# Altium PCB RTL8812AU.PcbDoc
Units mm, origin at the board's own origin, x right, y up, seen from the top; angles counter-clockwise.
Board outline 49.77 x 25.25 mm, 4 copper layers (Top Layer, GND, Signal Layer 1, Bottom Layer), stack 0.996 mm thick; 106 components, 49 nets, 367 pads, 313 vias.
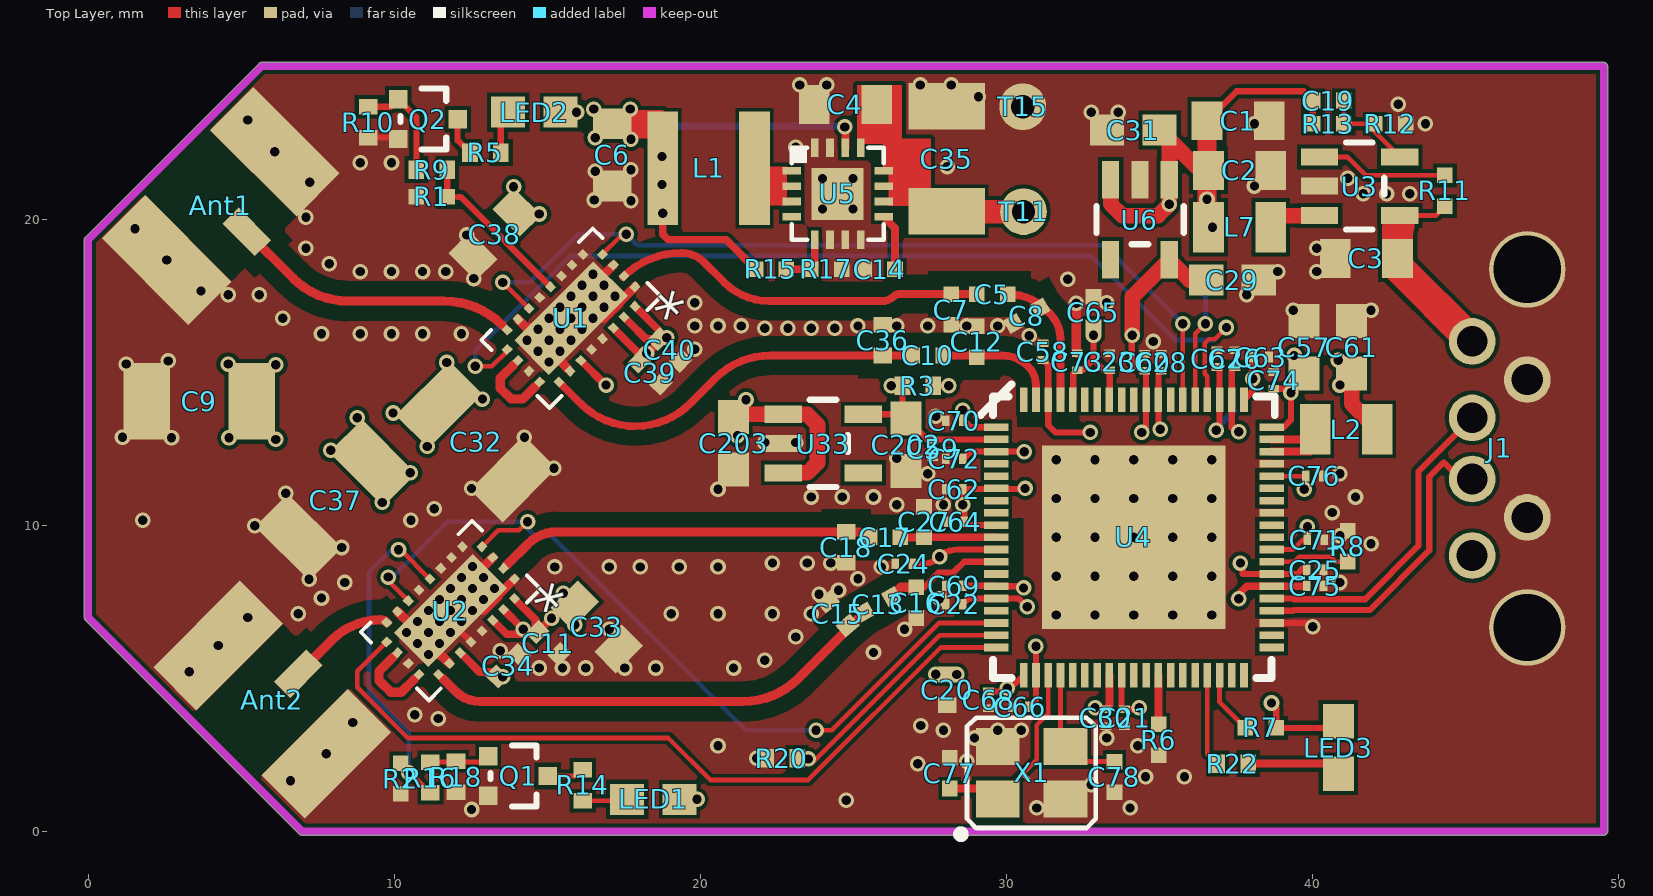
[diagram p0: Top Layer view]
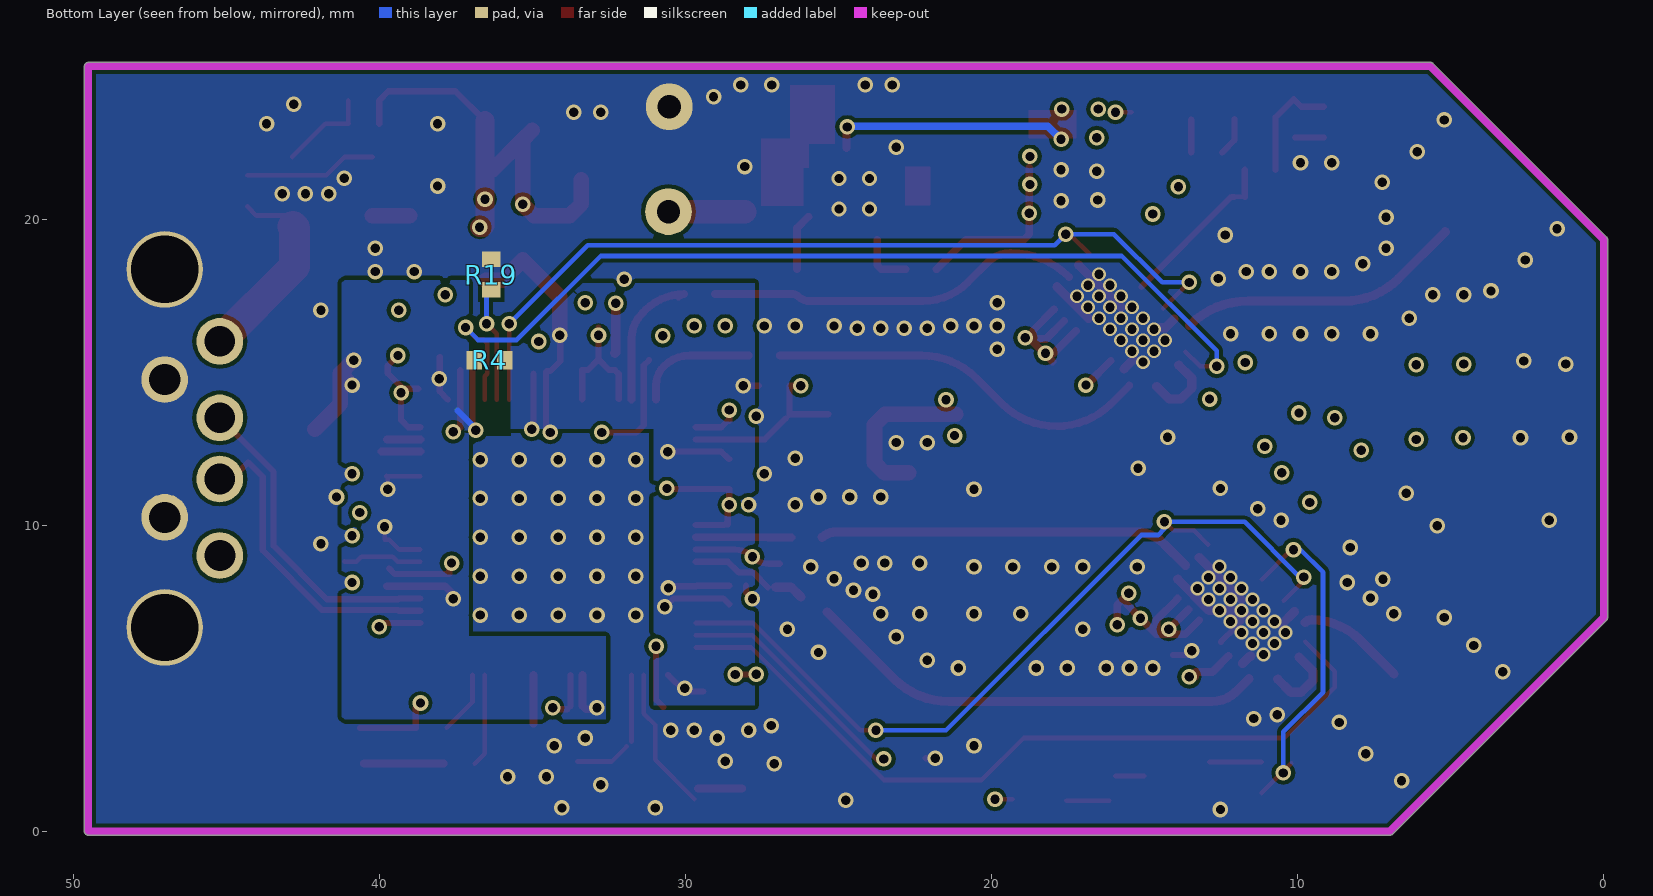
[diagram p1: Bottom Layer view, seen from below]
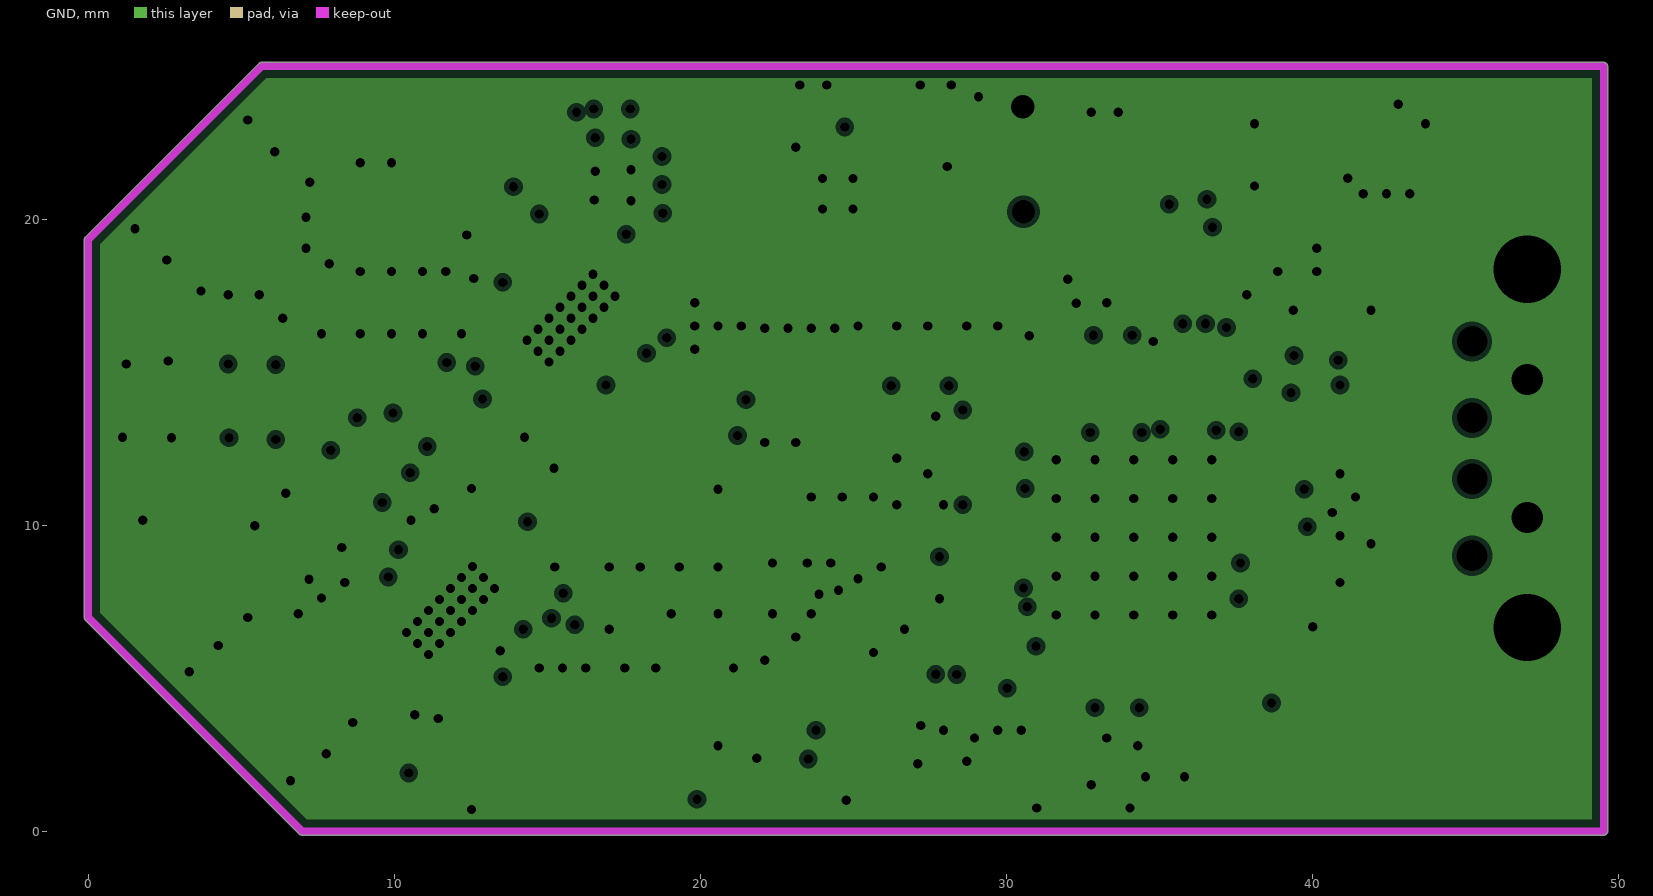
[diagram p2: GND, clearances drawn from the general rule]
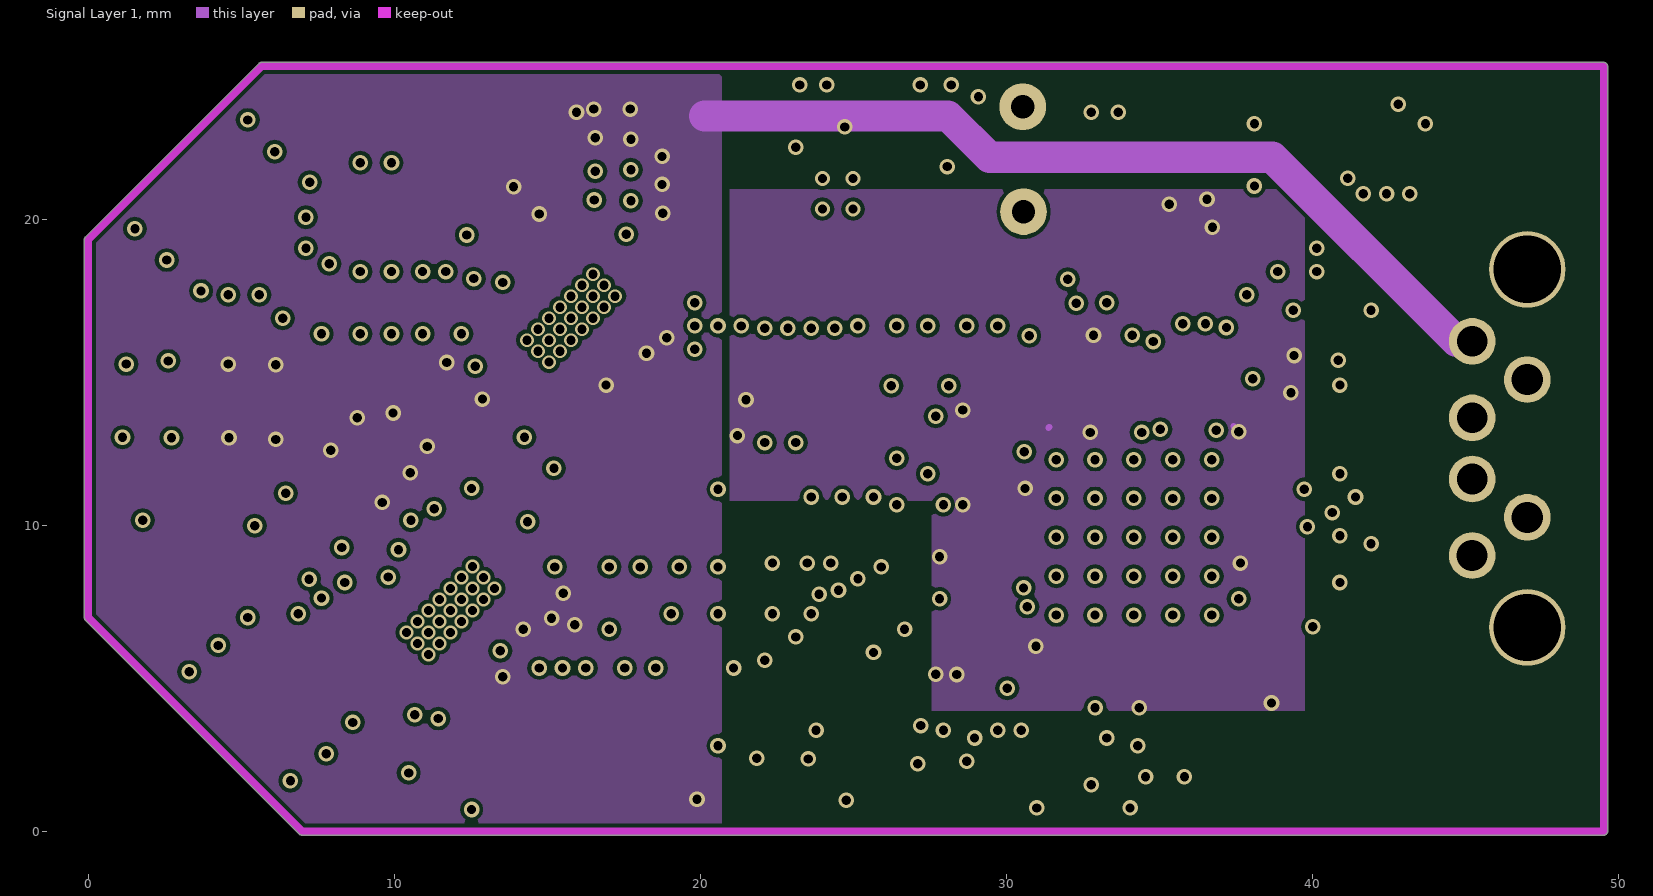
[diagram p3: Signal Layer 1]

## Layer stack, top to bottom
Top Solder: solder mask 0.0102, Solder Resist, Dk 3.5
Top Layer: signal copper 0.0356
Dielectric1: core 0.195, FR-4, Dk 4.2
GND: plane copper 0.0175, net GND
Dielectric 3: prepreg 0.5, Dk 4.2
Signal Layer 1: signal copper 0.0175
Dielectric 2: core 0.195, Dk 4.2
Bottom Layer: signal copper 0.0356
Bottom Solder: solder mask 0.0102, Solder Resist, Dk 3.5

## Board outline
-0.127,6.985 -0.127,19.329 cw(c0,19.329) -0.09,19.42 -0.09,19.419 5.574,25.084 5.574,25.083 cw(c5.664,24.994) 5.664,25.121 49.512,25.121 cw(c49.512,24.994) 49.639,24.994 49.639,0 cw(c49.512,0) 49.512,-0.127 6.985,-0.127 cw(c6.985,0) 6.894,-0.09 6.895,-0.09 -0.09,6.895 -0.09,6.894 cw(c0,6.985)

## Design rules (kind name [scope] priority, off if disabled: settings)
Clearance Clearance_1 [InNetClass('50R') vs InPolygon] p1: gap=0.508
Clearance [All] p2: gap=0.127
DiffPairsRouting [All] p1: maxlimit=0.254 minlimit=0.152 mostfreqgap=0.152 toplayer_minwidth=0.152 toplayer_maxwidth=0.381 toplayer_prefwidth=0.152 midlayer1_minwidth=0.152 midlayer1_maxwidth=0.381 midlayer1_prefwidth=0.152 bottomlayer_minwidth=0.152 bottomlayer_maxwidth=0.381 bottomlayer_prefwidth=0.152 maxuncoupledlength=12.7
MinimumSolderMaskSliver [All] p1 off: minsoldermaskwidth=0.254
PlaneClearance [All] p1: clearance=0.152
PlaneConnect [All] p1: planeconnectstyle=Direct reliefexpansion=0.508 reliefentries=4 reliefconductorwidth=0.254 reliefairgap=0.254
PolygonConnect [All] p1: connectstyle=Direct reliefconductorwidth=0.254 reliefentries=4 polygonreliefangle="90 Angle" airgapwidth=0.254
RoomDefinition RTL8812AU [InComponentClass('RTL8812AU')] p1 off: confinementstyle=ConfineIn formatcopy=TRUE lockcomponents=FALSE outline 33.372,-6.22 119.478,-6.22 119.478,-1.699 33.372,-1.699
RoomDefinition 4-USB-A [InComponentClass('4-USB-A')] p2 off: confinementstyle=ConfineIn formatcopy=TRUE lockcomponents=FALSE outline -161.624,-232.357 -110.824,-232.357 -110.824,-206.957 -161.624,-206.957
RoutingVias [All] p1: holewidth=0.305 width=0.508 viastyle="Through Hole" minholewidth=0.305 minwidth=0.508 maxholewidth=0.711 maxwidth=1.27
SilkToSilkClearance [All] p1 off: silktosilkclearance=0.254
SilkToSolderMaskClearance [IsPad] p1 off: minsilkscreentomaskgap=0.254 clearancetoexposedcopper=TRUE
SolderMaskExpansion [All] p1 off: expansion=0.102
UnpouredPolygon [All] p1: allowunpoured=FALSE
Width [All] p1: maxlimit=2.54 minlimit=0.152 preferedwidth=0.254
23 further rules are at their usual default settings.

## Classes and differential pairs
component class RTL8812AU: Ant1 Ant2 C5 C7 C8 C10 C11 C12 C13 C15 C16 C17 C18 C20 C21 C22 C23 C24 C25 C26 C27 C28 C30 C32 C33 C34 C36 C37 C38 C39 C40 C57 C58 C59 C60 C61 C62 C63 C64 C65 C66 C67 C68 C69 C70 C71 C72 C73 C74 C75 C76 C77 C78 L2 LED1 LED2 LED3 Q1 Q2 R1 R2 R5 R6 R7 R8 R9 R10 R14 R16 R18 R19 R20 R22 U1 U2 U4 X1
component class 4-USB-A: 5G C1 C2 C3 C4 C6 C9 C14 C19 C29 C31 C35 C202 C203 J1 L1 L7 R3 R4 R11 R12 R13 R15 R17 T11 T15 U3 U5 U6 U33
net class 50R: NetAnt1_1 NetAnt2_1 NetC5_2 NetC10_2 NetC13_2 NetC17_2 S0_IP S0_OP S1_IP S1_OP
differential pair UD: +UD_P -UD_N

## Components (designator, comment, footprint, x,y, rotation, side; value= is the part's Value field where it differs from the comment)
Ant1 "Antenna" SMA-2 6.096,22.2 r225 top
Ant2 "Antenna" SMA-2 4.242,6.071 r315 top
C1 "Cap" 0805 37.567,23.216 r180 top
C2 "Cap" 0805 37.617,21.59 r180 top
C3 "Cap" 0805 41.758,18.72 r0 top
C4 "Cap" 0805 24.74,23.749 r180 top
C5 "TBD" 0402#1 29.54,17.551 r180 top
C6 "Cap" 0805 17.12,22.098 r90 top
C7 "TBD" 0402#1 28.194,17.043 r90 top
C8 "TBD" 0402#1 30.658,16.84 r30 top
C9 "Cap" 1210 3.632,14.046 r0 top
C10 "TBD" 0402#1 27.432,15.545 r180 top
C11 "TBD" 0402#2 15.037,6.147 r135 top
C12 "TBD" 0402#1 29.032,16.002 r270 top
C13 "TBD" 0402#1 25.806,7.417 r210 top
C14 "3.3nF" 0402#1 25.857,18.364 r180 top
C15 "TBD" 0402#2 24.486,7.112 r310 top
C16 "TBD" 0402#1 27.051,7.468 r90 top
C17 "TBD" 0402#1 26.035,9.601 r180 top
C18 "TBD" 0402#2 24.765,9.271 r90 top
C19 "Cap" 0402#1 40.513,23.876 r0 top
C20 "10uF" 0402#2 28.067,4.623 r270 top
C21 "1uF" 0201 33.858,3.708 r90 top
C22 "1uF" 0201 28.296,7.417 r0 top
C23 "1uF" 0201 33.376,15.342 r270 top
C24 "1uF" 0201 26.645,8.738 r0 top
C25 "1uF" 0201 40.081,8.534 r180 top
C26 "1uF" 0201 37.465,15.443 r270 top
C27 "TBD" 0402#1 27.305,10.109 r270 top
C28 "1uF" 0201 35.052,15.316 r270 top
C29 "4.7uF" 0603 37.389,18.009 r180 top
C30 "1uF" 0201 33.249,3.708 r90 top
C31 "4.7uF" 0603 34.138,22.911 r0 top
C32 "Cap" 1210 12.675,12.725 r135 top
C33 "Cap" 0805 16.612,6.68 r135 top
C34 "TBD" 0402#2 13.716,5.41 r225 top
C35 "Cap" 1210 28.042,21.971 r90 top
C36 "TBD" 0402#2 25.959,16.053 r270 top
C37 "Cap" 1210 8.077,10.82 r45 top
C38 "Cap" 0805 13.284,19.507 r45 top
C39 "TBD" 0402#2 18.364,14.986 r135 top
C40 "TBD" 0402#2 18.999,15.723 r135 top
C57 "4.7uF" 0603 39.726,15.824 r270 top
C58 "1uF" 0201 31.191,15.672 r270 top
C59 "1uF" 0201 27.584,12.497 r90 top
C60 "1uF" 0201 34.519,15.316 r270 top
C61 "4.7uF" 0603 41.275,15.824 r270 top
C62 "1uF" 0201 28.296,11.176 r0 top
C63 "1uF" 0201 38.303,15.494 r180 top
C64 "1uF" 0201 28.346,10.109 r0 top
C65 "10uF" 0402#1 32.842,16.967 r270 top
C66 "1uF" 0201 30.455,4.064 r0 top
C67 "1uF" 0201 36.881,15.443 r90 top
C68 "1uF" 0201 29.413,4.293 r90 top
C69 "1uF" 0201 28.296,8.026 r0 top
C70 "1uF" 0201 28.296,13.411 r180 top
C71 "1uF" 0201 40.107,9.525 r0 top
C72 "1uF" 0201 28.296,12.167 r180 top
C73 "1uF" 0201 32.309,15.342 r90 top
C74 "1uF" 0201 38.735,14.732 r90 top
C75 "1uF" 0201 40.081,8.026 r0 top
C76 "1uF" 0201 40.056,11.608 r180 top
C77 "8pF" 0402#1 28.143,1.905 r270 top
C78 "8pF" 0402#1 33.528,1.778 r270 top
C202 "4.7uF" 0603 26.721,12.624 r90 top
C203 "4.7uF" 0603 21.082,12.675 r90 top
J1 "USB" USB-A-MALE 47.142,12.5 r0 top
L1 "2.2uH" L4015 21.768,21.666 r180 top
L2 "2.2uH" 0806 41.097,13.132 r0 top
L7 "2.2uH" 0806 37.617,19.736 r180 top
LED1 "LED0" 0603 18.466,1.041 r180 top
LED2 "LED0" 0603 14.58,23.495 r180 top
LED3 "LED0" 0603 40.843,2.743 r270 top
Q1 "NPN" LC-SOT-323(SC-70) 14.042,1.806 r180 top
Q2 "NPN" LC-SOT-323(SC-70) 11.096,23.269 r180 top
R1 "24k" 0402#1 11.227,20.726 r180 top
R2 "24k" 0402#1 10.211,1.727 r270 top
R3 "NC" 0402#2 27.102,14.554 r0 top
R4 "NC" 0402#2 36.398,15.392 r0 bottom
R5 "Res2" 0402#2 12.979,22.174 r180 top
R6 "24k" 0402#1 34.976,2.997 r270 top
R7 "24k" 0402#1 38.303,3.378 r0 top
R8 "6.2k 1%" 0402#1 41.148,9.322 r270 top
R9 "10k" 0402#2 11.227,21.615 r180 top
R10 "10k" 0402#2 9.144,23.165 r90 top
R11 "10k" 0402#1 44.323,20.93 r270 top
R12 "10k" 0402#1 42.545,23.114 r180 top
R13 "45k" 0402#1 40.513,23.114 r180 top
R14 "Res2" 0402#2 16.154,1.499 r90 top
R15 "51k 1%" 0402#1 22.301,18.364 r0 top
R16 "10k" 0402#2 11.176,1.753 r90 top
R17 "10k 1%" 0402#1 24.105,18.364 r0 top
R18 "10k" 0402#2 12.014,1.778 r90 top
R19 "Res2" 0402#2 36.347,18.186 r90 bottom
R20 "Res2" 0402#2 22.657,2.388 r180 top
R22 "10k" 0402#2 37.389,2.21 r0 top
T11 "TestPad" TestPad 30.556,20.244 r270 top
T15 "TestPad" TestPad 30.531,23.673 r0 top
U1 "SKY85743" SKY85743 15.773,16.764 r225 top
U2 "SKY85743" SKY85743 11.835,7.212 r225 top
U3 "RT8059" SOT23-5 41.529,21.082 r270 top
U4 "RTL8812AU" RTL8812AU 34.162,9.604 r0 top (schematic designator U3)
U5 "TPS62130" TPS62130 24.486,20.828 r0 top
U6 "LP5907" SOT23-5 34.366,19.99 r180 top
U33 "LP5907" SOT23-5 24.003,12.675 r270 top
X1 "8mhz" OSCILLATOR-3.2X2.5 30.81,1.905 r0 top

## Footprints (in the part's own frame and the unit in brackets; to place one, negate y for a bottom-side part, rotate by r counter-clockwise, add the part's x,y. Pads: shape width x height; smd on the part's side, far side on the other; paste and mask are expansions set on the pad)
0201 [mm]
  rect 0.25x0.35 smd: 1(-0.275,0) 2(0.275,0)
0402#1 [mil] "0402-RES"
  rect 20x20 smd: 1(-19.68,0) 2(20,0)
0402#2 [mil] "0402-RES"
  rect 20x24 smd: 1(-19.69,0) 2(20,0)
0603 [mil] "0603-RES"
  rect 44x40 smd: 1(-33.46,0) 2(34,0)
0805 [mm]
  rect 1x1.27 smd: 1(-1.016,0) 2(1.016,0)
  body extent -1.27,-0.76 1.27,0.76, height 0.8
0806 [mm]
  rect 1x1.65 smd: 1(-1.016,0) 2(1.016,0)
  body extent -1,-0.8 1,0.8, height 0.5
1210 [mm]
  rect 1.52x2.5 smd: 1(-1.715,0) 2(1.715,0)
L4015 [mm]
  rect 1x3.7 smd: 1(0,0) 2(3,0)
LC-SOT-323(SC-70) [mm]
  rect 0.6x0.6 smd: 1(0.97,-0.65) 2(0.97,0.65) 3(-0.97,0)
  silkscreen extent -0.6,-1 0.9,1, body extent -1.12,-1.1 1.12,1.1, height 1.1
OSCILLATOR-3.2X2.5 [mil] "OSCILLATOR-3.2X2.5"
  rect 56x48 smd: 1(-43.31,-33.46) 2(44,-33.46) 3(44,34) 4(-43.31,34)
  silkscreen extent -95,-83 83,71
RTL8812AU [mm]
  rect 6x6 smd: 0(0,0)
  rect 0.8x0.25 smd: 1(-4.5,3.6) 2(-4.5,3.2) 3(-4.5,2.8) 4(-4.5,2.4) 5(-4.5,2) 6(-4.5,1.6) 7(-4.5,1.2) 8(-4.5,0.8) 9(-4.5,0.4) 10(-4.5,0) 11(-4.5,-0.4) 12(-4.5,-0.8) 13(-4.5,-1.2) 14(-4.5,-1.6) 15(-4.5,-2) 16(-4.5,-2.4) 17(-4.5,-2.8) 18(-4.5,-3.2) 19(-4.5,-3.6) 39(4.5,-3.6) 40(4.5,-3.2) 41(4.5,-2.8) 42(4.5,-2.4) 43(4.5,-2) 44(4.5,-1.6) 45(4.5,-1.2) 46(4.5,-0.8) 47(4.5,-0.4) 48(4.5,0) 49(4.5,0.4) 50(4.5,0.8) 51(4.5,1.2) 52(4.5,1.6) 53(4.5,2) 54(4.5,2.4) 55(4.5,2.8) 56(4.5,3.2) 57(4.5,3.6)
  rect 0.25x0.8 smd: 20(-3.6,-4.5) 21(-3.2,-4.5) 22(-2.8,-4.5) 23(-2.4,-4.5) 24(-2,-4.5) 25(-1.6,-4.5) 26(-1.2,-4.5) 27(-0.8,-4.5) 28(-0.4,-4.5) 29(0,-4.5) 30(0.4,-4.5) 31(0.8,-4.5) 32(1.2,-4.5) 33(1.6,-4.5) 34(2,-4.5) 35(2.4,-4.5) 36(2.8,-4.5) 37(3.2,-4.5) 38(3.6,-4.5) 58(3.6,4.5) 59(3.2,4.5) 60(2.8,4.5) 61(2.4,4.5) 62(2,4.5) 63(1.6,4.5) 64(1.2,4.5) 65(0.8,4.5) 66(0.4,4.5) 67(0,4.5) 68(-0.4,4.5) 69(-0.8,4.5) 70(-1.2,4.5) 71(-1.6,4.5) 72(-2,4.5) 73(-2.4,4.5) 74(-2.8,4.5) 75(-3.2,4.5) 76(-3.6,4.5)
  silkscreen extent -5,-4.6 4.6,5, body extent -4.5,-4.5 4.5,4.5, height 0.85
SKY85743 [mm]
  rect 3.65x1.6 smd: 0(0,0)
  rect 0.275x0.25 smd: 1(-2.2,0.75) 2(-2.2,0.25) 3(-2.2,-0.25) 4(-2.2,-0.75) 13(2.2,-0.75) 14(2.2,-0.25) 15(2.2,0.25) 16(2.2,0.75)
  rect 0.25x0.275 smd: 5(-1.75,-1.2) 6(-1.25,-1.2) 7(-0.75,-1.2) 8(-0.25,-1.2) 9(0.25,-1.2) 10(0.75,-1.2) 11(1.25,-1.2) 12(1.75,-1.2) 17(1.75,1.2) 18(1.25,1.2) 19(0.75,1.2) 20(0.25,1.2) 21(-0.25,1.2) 22(-0.75,1.2) 23(-1.25,1.2) 24(-1.75,1.2)
  silkscreen extent -2.58,-1.58 2.58,1.58, body extent -2.5,-1.5 2.5,1.5, height 1.2
SMA-2 [mm]
  rect 0.75x1.5 smd: 1(2.5,1.2)
  rect 2x4 smd: GND(0,0) GND(5,0)
  Top Layer pour cut-out: 1,2 4,2 4,-2 1,-2
SOT23-5 [mil] "SOT23-5"
  rect 22x48 smd: 1(-37.4,-51.19) 2(0,-51.19) 3(38,-51.19) 4(38,52) 5(-37.4,52)
  silkscreen extent -56,-17 56,32
TestPad [mil]
  round 60 hole 30: 1(0,0)
TPS62130 [mm]
  rect 1.7x1.7 smd: 0(0,0)
  rect 0.6x0.25 smd: 1(-1.5,0.75) 2(-1.5,0.25) 3(-1.5,-0.25) 4(-1.5,-0.75) 9(1.5,-0.75) 10(1.5,-0.25) 11(1.5,0.25) 12(1.5,0.75)
  rect 0.25x0.6 smd: 5(-0.75,-1.5) 6(-0.25,-1.5) 7(0.25,-1.5) 8(0.75,-1.5) 13(0.75,1.5) 14(0.25,1.5) 15(-0.25,1.5) 16(-0.75,1.5)
  silkscreen extent -1.5,-1.5 1.5,1.5, body extent -1.5,-1.5 1.5,1.5, height 0.6
USB-A-MALE [mil]
  round 98.43 hole 86.61: 0(-5,-230) 0(-5,230.63)
  round 60 hole 40: 0(-5,-88.27) 0(-5,88.9) 4(-75.87,-137.48)
  round 60 hole 39.37: 1(-75.87,138.11) 2(-75.87,39.69) 3(-75.87,-39.06)
  body extent 3,-234 743,239, height 157

## Part data
C1 C2 C3 C4 C6 C9 C19 C32 C33 C35 C37 C38: "Capacitor"
C5 C7 C8 C10 C11 C12 C13 C14 C15 C16 C17 C18 C20 C21 C22 C23 C24 C25 C26 C27 C28 C29 C30 C31 C34 C36 C39 C40 C57 C58 C59 C60 C61 C62 C63 C64 C65 C66 C67 C68 C69 C70 C71 C72 C73 C74 C75 C76 C77 C78 C202 C203: library part Cap, "Capacitor"
L1 L2 L7: library part Inductor, "Inductor"
LED1 LED2 LED3: "Typical INFRARED GaAs LED"
Q1 Q2: "NPN Bipolar Transistor"
R1 R2 R3 R4 R6 R7 R8 R9 R10 R11 R12 R13 R15 R16 R17 R18 R22: library part Res2, "Resistor"
R5 R14 R19 R20: "Resistor"
X1: library part OSCILLATOR-3.2X2.5, "Crystal Oscillator in 3.2x2.5 SMD"

## Via types
v1: diameter 0.508, hole 0.305, Top Layer to Bottom Layer, 267 vias
v2: diameter 0.45, hole 0.3, Top Layer to Bottom Layer, 42 vias
v3: diameter 0.5, hole 0.3, Top Layer to Bottom Layer, 4 vias

## Nets (pads, with @x,y where several pads share a name; then routed paths per layer and width w, separated by ;. In a path a pad name is that pad's centre, name@x,y a point inside that pad or via, vN(x,y) a via of type N, cw(c..) or ccw(c..) an arc to the next point about the centre after c; other vN are vias at no path point)
1.2A: C22.2 C28.2 C29.2 C60.2 C68.2 C69.2 C72.1 R3.2 R4.1 U4.3 U4.14 U4.15 U4.20 U4.65 U4.66 U6.5 | length 18.1
  Top Layer w0.203: R3.2 v1(28.118,14.554) ; C22.2 28.758,7.604 U4.15 30.395,7.604 30.658,7.341 v1(30.683,7.341) ; C69.2 28.571,8.025 U4.14@29.641,8.025 ; C72.1 28.595,12.167 28.832,12.404 U4.3 30.497,12.404 30.505,12.395 v1(30.582,12.395) ; C68.2 v1@30.026,4.568 ; U4.14 30.503,8.004 v1(30.556,7.95) ; v1(30.026,4.671) v1@30.026,4.568 ; U4.20 v1@30.026,4.568 ; v1(34.112,16.205) 34.09,16.183 34.09,15.361 34.409,15.041 C60.2 ; v1(34.417,13.03) 34.562,13.175 U4.66 C60.2@34.562,14.998 ; C28.2@34.962,14.951 U4.65 34.962,13.298 35.052,13.208 35.027,13.183 v1(35.027,13.132)
  Top Layer w0.508: v1(34.112,16.205) 34.112,17.465 U6.5 35.977,18.009 C29.2
1.2D: C30.2 C61.2 C63.2 C67.1 C71.1 C75.1 C76.2 L2.2 R4.2 U4.27 U4.44 U4.47 U4.53 U4.58 U4.60 | length 15.3
  Top Layer w0.152: U4.47 39.354,9.204 39.675,9.525 C71.1 v1(39.832,9.952) ; U4.53 C76.2@39.777,11.604 ; v1(39.726,11.176) 39.726,11.553 C76.2@39.777,11.604 ; C76.2 C76.2@39.777,11.604
  Top Layer w0.203: v1(36.854,13.097) 36.923,13.097 36.962,13.137 U4.60 C67.1@36.962,15.087 ; U4.58 38.028,14.37 C63.2
  Top Layer w0.254: v1(32.893,4.039) 32.948,3.983 C30.2 33.362,4.097 U4.27 ; v1(37.592,7.595) 37.443,7.595 37.441,7.596 37.849,8.004 U4.44 C75.1@39.758,8.004
  Top Layer w0.508: v1(40.843,15.392) C61.2 ; v1(40.894,14.58) C61.2 ; L2.2 41.275,13.97 C61.2
  Signal Layer 1 w0.203: v1(36.854,13.097) v1@36.888,13.132
  Bottom Layer w0.203: v1(36.854,13.097) 36.854,13.156 37.44,13.741
  other v1: 38.049,14.783
1.2SYN: C59.2 C202.2 R3.1 U4.2 U33.5 | length 5.8
  Top Layer w0.203: U33.5 C202.2@26.584,13.625 ; v1(26.238,14.554) R3.1 C202.2@26.602,13.606 ; C202.2 27.404,12.804 U4.2
3.3VD: C1.2 C2.2 C19.1 C20.1 C21.2 C23.2 C24.2 C25.2 C26.2 C31.2 C57.2 C58.2 C62.2 C64.2 C65.2 C66.2 C70.1 C73.1 C74.1 C203.2 L7.2 LED3.1 R7.2 R13.2 U4.1 U4.6 U4.9 U4.11 U4.21 U4.28 U4.45 U4.57 U4.59 U4.69 U4.72 U4.74 U6.1 U6.3 U33.1 U33.3 | length 53.4
  Top Layer w0.203: C24.2 27.261,8.738 ccw(c27.261,9.518) v1(27.813,8.966) cw(c28.387,8.393) 28.387,9.204 U4.11 ; v1(27.686,5.131) 27.694,5.123 C20.1 v1(28.38,5.123) ; v1@28.571,10.672 C62.2 28.571,11.183 30.538,11.183 30.582,11.227 v1(30.607,11.201) ; v1(28.571,13.762) C70.1 28.62,13.411 28.828,13.204 U4.1 ; C64.2@28.621,10.025 C64.2 ; v1@28.621,10.622 C64.2 ; U4.9 28.727,10.004 C64.2 ; C66.2 30.962,4.296 U4.21 v1(30.962,6.046) ; C58.2 31.362,15.226 U4.74 31.362,13.266 31.598,13.03 v1(32.741,13.03) ; U4.72@32.183,14.125 32.183,14.941 C73.1 32.491,15.067 32.842,15.418 ; C65.2 v1(32.842,16.205) 32.842,15.418 ; U4.69@33.376,14.118 C23.2 33.193,15.067 32.842,15.418 ; C21.2@33.762,4.08 U4.28 ; C21.2 34.286,3.983 v1(34.341,4.039) ; C1.2 37.516,24.181 39.708,24.181 C19.1 ; C26.2@37.362,15.065 U4.59 37.362,13.184 37.49,13.056 v1(37.592,13.056) ; v1(37.643,8.763) 37.646,8.767 37.715,8.767 37.715,8.404 U4.45 39.499,8.404 39.68,8.585 ; v1(38.659,4.191) 38.811,4.039 R7.2 LED3.1@40.628,3.378 ; U4.57 39.061,13.204 39.294,13.437 v1(39.294,14.326) C57.2@39.294,14.529 ; C74.1 39.222,14.457 C57.2@39.294,14.529 ; v1(39.395,15.545) 39.726,15.215 C57.2 C57.2@39.294,14.529 ; R13.2 C19.1@40.005,23.868
  Top Layer w0.508: C203.2@21.168,13.625 U33.1 23.485,13.625 23.825,13.284 23.825,12.04 23.495,11.709 U33.3 ; U6.3 33.401,20.498 33.782,20.117 34.95,20.117 v1(35.316,20.483) U6.1 C31.2@35.316,22.596 ; C31.2 C31.2@35.316,22.596 ; C2.2 36.551,21.59 36.322,21.59 C31.2@35.316,22.596
  Top Layer w0.635: L7.2@36.551,19.787 v1(36.551,20.65) 36.551,21.59 C1.2 ; L7.2 v1(36.728,19.736)
  Signal Layer 1 w0.203: 31.369,13.183 31.394,13.208 ; v1@32.842,16.129 v1(32.842,16.205) ; v1@37.414,13.233 v1(37.592,13.056) ; v1(37.643,8.763) v1@37.643,8.839
  other v1: 28.575,10.668 21.209,12.929 21.488,14.097
5V: C3.2 C6.2 C9.2 C11.2 C32.2 C33.2 C34.2 C37.2 C38.2 C39.2 C40.2 J1.1 L1.2 LED1.1 LED2.1 R11.2 R15.1 U1.19 U1.22 U1.23 U1.24 U2.19 U2.22 U2.23 U2.24 U3.4 U5.14 | length 63
  Top Layer w0.152: LED2.1 v1(15.951,23.495) ; LED1.1 v1(19.888,1.041) ; U3.4 44.018,20.117 R11.2
  Top Layer w0.254: 12.257,5.729 12.783,5.203 C34.2@13.331,5.203 ; U2.22 13.67,6.438 C11.2@14.377,6.438 ; C34.2 v1(13.542,5.051) ; U2.23 v1(14.211,6.604) C11.2@14.377,6.438 ; U2.24 14.61,6.912 14.61,6.438 C11.2@14.377,6.438 ; C11.2 v1(15.135,6.963) C33.2@15.57,7.399 ; v1(15.519,7.772) C33.2 v1(15.893,6.749) ; U1.19@16.107,15.37 16.897,14.58 v1(16.916,14.58) ; U1.22@17.244,16.355 C39.2@18.005,15.593 ; 17.622,16.683 18.223,16.082 C40.2 ; 17.963,17.049 18.64,16.372 C40.2 ; C39.2 18.64,15.98 C40.2 ; L1.2 18.768,19.51 18.954,19.323 20.842,19.323 R15.1 ; v1(24.714,23.012) 24.718,23.016 24.736,23.016 U5.14
  Top Layer w1.016: 42.824,19.761 42.774,19.71 C3.2 42.774,18.45 J1.1
  Signal Layer 1 w1.016: 20.142,23.368 28.092,23.368 29.439,22.022 38.684,22.022 44.698,16.008 J1.1
  Bottom Layer w0.254: v1(17.729,22.606) 18.161,23.038 24.714,23.038 v1(24.714,23.012)
  other v1: 9.601,10.744 10.516,11.709 7.925,12.446 11.074,12.573 6.121,12.802 4.597,12.852 8.788,13.513 9.957,13.665 12.878,14.122 6.121,15.24 4.572,15.265 11.709,15.316 18.237,15.621 18.898,16.129 14.732,20.168 18.771,20.193 13.894,21.057 18.745,21.133 18.745,22.047 16.561,22.657 16.51,23.597 17.704,23.597
GND: Ant1.GND Ant2.GND C1.1 C2.1 C3.1 C4.2 C6.1 C7.1 C8.1 C9.1 C11.1 C12.1 C14.2 C15.1 C16.1 C18.1 C20.2 C21.1 C22.1 C23.1 C24.1 C25.1 C26.1 C27.1 C28.1 C29.1 C30.1 C31.1 C32.1 C33.1 C34.1 C35.2 C36.1 C37.1 C38.1 C39.1 C40.1 C57.1 C58.1 C59.1 C60.1 C61.1 C62.1 C63.1 C64.1 C65.1 C66.1 C67.2 C68.1 C69.1 C70.2 C71.2 C72.2 C73.2 C74.2 C75.2 C76.1 C77.1 C78.2 C202.1 C203.1 J1.0 Q1.2 Q2.2 R1.2 R2.2 R6.2 R8.1 R10.1 R12.1 R17.2 R18.1 R19.2 R20.2 T15.1 U1.0 U1.1 U1.3 U1.5 U1.6 U1.7 U1.9 U1.11 U1.15 U1.18 U1.20 U1.21 U2.0 U2.1 U2.3 U2.5 U2.6 U2.7 U2.9 U2.11 U2.15 U2.18 U2.20 U2.21 U3.2 U4.0 U4.41 U4.50 U4.54 U5.0 U5.6 U5.7 U5.8 U5.15 U5.16 U6.2 U33.2 X1.2 X1.4 | length 17.1
  Top Layer w0.203: R10.1 Q2.2@10.08,22.665 ; U2.0@11.835,6.859 12.012,6.682 U2.20 ; v1(13.462,5.893) v1@13.462,5.939 ; v1@13.462,5.944 v1@13.462,5.939 ; C34.1 13.637,5.764 v1@13.462,5.939 ; v1(21.844,2.388) R20.2 ; v1(27.813,7.599) 28.021,7.807 C69.1 ; U4.41 39.881,6.804 v1(40.005,6.68)
  Top Layer w0.305: U2.11 U2.0@10.519,6.76 ; 11.532,5.715 cw(c11.532,5.636) 11.588,5.692 U2.18 ; U2.0@11.689,7.066 v2(11.835,7.212) ; U2.0@11.835,7.566 U2.3 ; U2.0@12.012,6.682 12.012,7.035 v2(11.835,7.212) ; U2.1 12.896,7.212 v2(11.835,7.212) ; U1.11 14.315,16.455 U1.0@14.503,16.455 ; U1.0@15.363,15.421 15.443,15.342 U1.18@15.668,15.109 ; U1.0@15.773,17.118 U1.3 ; U1.0@16.834,16.764 U1.1 ; v1(32.283,17.247) 32.283,15.642 C73.2
  other v1: 12.522,0.711 30.988,0.762 34.036,0.762 24.765,1.016 32.766,1.524 6.604,1.651 34.544,1.778 35.814,1.778 27.102,2.21 28.702,2.286 7.777,2.535 20.574,2.794 34.29,2.794 28.956,3.048 33.274,3.048 27.94,3.302 29.718,3.302 30.48,3.302 27.203,3.454 8.636,3.556 11.43,3.683 10.668,3.81 3.302,5.207 14.732,5.334 15.494,5.334 16.256,5.334 17.526,5.334 18.542,5.334 21.082,5.334 22.098,5.588 25.654,5.842 4.242,6.071 23.114,6.35 17.018,6.604 26.67,6.604 5.207,6.985 31.622,7.064 32.892,7.064 34.162,7.064 35.432,7.064 36.702,7.064 6.858,7.112 19.05,7.112 20.574,7.112 22.352,7.112 23.622,7.112 7.62,7.62 23.876,7.747 24.511,7.874 8.382,8.128 40.894,8.128 7.214,8.23 25.146,8.255 31.622,8.334 32.892,8.334 34.162,8.334 35.432,8.334 36.702,8.334 15.24,8.636 17.018,8.636 18.034,8.636 19.304,8.636 20.574,8.636 25.908,8.636 22.352,8.763 23.495,8.763 24.257,8.763 8.28,9.271 41.91,9.398 31.622,9.604 32.892,9.604 34.162,9.604 35.432,9.604 36.702,9.604 40.894,9.652 5.436,9.982 1.778,10.16 10.541,10.16 40.64,10.414 11.303,10.541 26.416,10.668 27.94,10.668 31.622,10.874 32.892,10.874 34.162,10.874 35.432,10.874 36.702,10.874 23.622,10.922 24.638,10.922 25.654,10.922 41.402,10.922 6.452,11.049 20.574,11.176 12.522,11.201 27.432,11.684 40.894,11.684 15.215,11.862 31.622,12.144 32.892,12.144 34.162,12.144 35.432,12.144 36.702,12.144 26.416,12.192 22.098,12.7 23.114,12.7 2.718,12.852 1.118,12.878 14.249,12.878 27.686,13.564 1.245,15.265 2.616,15.367 19.812,15.748 34.798,16.002 30.739,16.192 7.62,16.256 8.89,16.256 9.906,16.256 10.922,16.256 12.192,16.256 22.098,16.434 22.86,16.434 23.622,16.434 24.384,16.434 19.812,16.51 20.574,16.51 21.336,16.51 25.146,16.51 26.416,16.51 27.432,16.51 28.702,16.51 29.718,16.51 6.35,16.764 39.37,17.018 41.91,17.018 19.812,17.272 33.274,17.272 4.572,17.526 5.588,17.526 37.846,17.526 3.683,17.653 32.004,18.034 12.598,18.059 8.89,18.288 9.906,18.288 10.922,18.288 11.684,18.288 38.862,18.288 40.132,18.288 7.874,18.542 2.56,18.664 7.112,19.05 40.132,19.05 12.37,19.482 1.524,19.685 7.112,20.066 17.729,20.599 16.535,20.625 41.656,20.828 42.418,20.828 43.18,20.828 38.1,21.082 7.239,21.209 41.148,21.336 16.561,21.565 17.729,21.615 28.067,21.717 8.89,21.844 9.906,21.844 6.096,22.2 23.114,22.352 38.1,23.114 43.688,23.114 5.207,23.241 32.766,23.495 33.655,23.495 42.799,23.749 29.083,24.003 23.241,24.384 24.13,24.384 27.178,24.384 28.194,24.384
  other v2: 11.117,5.775 10.757,6.135 11.476,6.135 10.398,6.494 11.117,6.494 11.835,6.494 10.757,6.853 11.476,6.853 12.194,6.853 11.117,7.212 12.553,7.212 11.476,7.571 12.194,7.571 12.913,7.571 11.835,7.931 12.553,7.931 13.272,7.931 12.194,8.29 12.913,8.29 12.553,8.649 15.055,15.327 14.696,15.686 15.414,15.686 14.337,16.046 15.055,16.046 15.773,16.046 14.696,16.405 15.414,16.405 16.133,16.405 15.055,16.764 15.773,16.764 16.492,16.764 15.414,17.123 16.133,17.123 16.851,17.123 15.773,17.482 16.492,17.482 17.21,17.482 16.133,17.842 16.851,17.842 16.492,18.201
  other v3: 23.986,20.328 24.986,20.328 23.986,21.328 24.986,21.328
NetAnt1_1: Ant1.1 U1.12 | length 9.4
  Top Layer w0.305: Ant1.1 6.693,18.067 ccw(c8.489,19.863) 8.489,17.323 11.618,17.323 cw(c11.618,14.614) 13.533,16.529
NetAnt2_1: Ant2.1 U2.12 | length 3.5
  Top Layer w0.305: Ant2.1 7.96,6.253 cw(c9.543,4.671) 9.543,6.909 cw(c9.543,6.617) U2.12
NetC5_2: C5.2 C7.2 U1.2 | length 12.4
  Top Layer w0.254: U1.2@17.469,18.106 cw(c19.38,16.195) 19.38,18.898 cw(c19.38,17.855) 20.117,18.592 20.777,17.932 ccw(c22.249,19.404) 22.249,17.323 25.946,17.323 ccw(c25.946,17.843) 26.314,17.475 cw(c26.498,17.291) 26.498,17.551 C7.2 C5.2
NetC10_2: C10.2 C36.2 U1.17 | length 12.6
  Top Layer w0.254: 15.501,14.561 16.092,13.97 ccw(c17.871,15.748) 17.871,13.233 ccw(c17.871,15.773) 19.667,13.977 20.49,14.801 cw(c22.287,13.005) 22.287,15.545 C36.2 C10.2
NetC13_2: C13.2 C15.2 U2.17 | length 15.1
  Top Layer w0.305: 11.588,4.984 11.997,4.575 ccw(c12.802,5.379) 12.802,4.242 21.393,4.242 ccw(c21.393,6.782) 23.189,4.986 C13.2
NetC14_1: C14.1 U5.9 | length 1.9
  Top Layer w0.254: U5.9 26.357,19.706 C14.1
NetC17_2: C17.2 C18.2 U2.2 | length 12.3
  Top Layer w0.305: U2.2@13.664,8.688 14.365,9.389 cw(c15.307,8.446) 15.307,9.779 25.098,9.779 cw(c25.098,9.172) C17.2
NetC19_2: C19.2 R12.2 R13.1 U3.5 | length 3
  Top Layer w0.152: R13.1 41.768,23.114 U3.5 ; R13.1@41.021,23.122 C19.2
NetC77_2: C77.2 U4.22 X1.1 | length 6.2
  Top Layer w0.152: X1.1 30.988,2.333 30.988,3.473 31.362,3.847 U4.22
  Top Layer w0.254: C77.2 X1.1@29.595,1.397
NetC78_1: C78.1 U4.23 X1.3 | length 4
  Top Layer w0.152: X1.3@31.762,2.935 U4.23 ; X1.3 32.418,2.278 C78.1
NetL1_1: L1.1 U5.1 U5.2 U5.3
NetL2_1: L2.1 U4.55 U4.56 | length 2.4
  Top Layer w0.254: U4.55 L2.1@39.929,12.404 ; U4.56 L2.1@39.753,12.804
NetL7_1: L7.1 U3.3 | length 1.2
  Top Layer w0.508: L7.1@39.014,20.117 U3.3
NetLED1_2: LED1.2 R14.1 | length 1.4
  Top Layer w0.152: R14.1 LED1.2@17.559,0.999
NetLED2_2: LED2.2 R5.1 | length 1.1
  Top Layer w0.203: R5.1 LED2.2@13.479,23.258
NetLED3_2: LED3.2 R22.2 | length 2.6
  Top Layer w0.254: R22.2 LED3.2@40.513,2.21
NetQ1_1: Q1.1 R16.2 R18.2 | length 1.7
  Top Layer w0.152: R16.2 Q1.1@12.877,2.261
NetQ1_3: Q1.3 R14.2 | length 0.9
  Top Layer w0.152: Q1.3 R14.2@15.954,1.806
NetQ2_1: Q2.1 R9.2 R10.2 | length 3.6
  Top Layer w0.203: R10.2 9.88,23.673 Q2.1 10.719,23.326 R9.2
NetQ2_3: Q2.3 R5.2 | length 1.3
  Top Layer w0.203: Q2.3 12.066,22.58 R5.2
NetR6_1: R6.1 U4.31 | length 1.6
  Top Layer w0.254: R6.1@34.962,3.511 U4.31
NetR7_1: R7.1 U4.36 | length 2.1
  Top Layer w0.152: U4.36 36.962,4.22 R7.1
NetR8_2: R8.2 U4.46 | length 2.6
  Top Layer w0.152: U4.46 39.402,8.804 39.564,8.966 40.598,8.966 40.761,8.804 41.138,8.804 R8.2
NetR11_1: R11.1 U3.1 | length 4.3
  Top Layer w0.152: U3.1 41.138,22.032 41.74,21.43 R11.1
NetR15_2: R15.2 R17.1 U5.5 | length 1.8
  Top Layer w0.254: R15.2 R17.1 23.736,18.495 U5.5
NetR22_1: R22.1 U4.35 | length 3
  Top Layer w0.152: U4.35 36.562,2.537 R22.1
NetU1_14: U1.14 U1.16 | length 2.4
  Top Layer w0.305: 13.882,15.226 13.462,14.806 13.462,14.478 13.818,14.122 14.192,14.122 14.602,14.532
NetU2_14: U2.14 U2.16 | length 2.4
  Top Layer w0.305: 9.958,5.689 9.5,5.23 9.5,4.928 9.881,4.547 10.23,4.547 10.652,4.969
S0_DET: R2.1 R16.1 U2.8 | length 11.2
  Top Layer w0.152: v1@10.206,9.195 U2.8 ; R2.1 11.176,1.262 R16.1 ; v1(10.465,1.905) v1@10.516,1.854
  Bottom Layer w0.152: v1(10.135,9.195) 9.906,9.195 9.169,8.458 9.169,4.547 10.465,3.251 v1(10.465,1.905)
S0_IP: C13.1 C16.2 U4.12 | length 3.6
  Top Layer w0.203: 27.311,7.976 27.79,8.455 28.267,8.455 28.616,8.804 U4.12
  Top Layer w0.305: C13.1 26.548,7.976 C16.2
S0_OP: C17.1 C27.2 U4.10 | length 3.1
  Top Layer w0.254: C17.1 C27.2 27.308,9.604 U4.10
S0_PAEN: U2.4 U2.10 U4.17 | length 27.8
  Top Layer w0.152: v1(9.804,8.306) 9.804,8.182 U2.10 ; U2.4@12.931,9.369 13.392,9.83 14.072,9.83 v1(14.351,10.109) ; v1(23.778,3.302) 24.284,3.302 27.786,6.804 U4.17
  Bottom Layer w0.152: v1(9.804,8.306) 9.931,8.306 11.735,10.109 v1(14.351,10.109) 14.351,9.881 14.554,9.677 15.113,9.677 21.488,3.302 v1(23.778,3.302)
S0_SW: R20.1 U4.18 | length 8
  Top Layer w0.152: v1(23.52,2.362) v1@23.647,2.235 ; v1@23.648,2.235 27.817,6.404 U4.18
  Signal Layer 1 w0.152: v1(23.52,2.362) v1@23.597,2.286
S0_SWB: U2.13 U4.19 | length 25.8
  Top Layer w0.152: U2.13 8.788,5.226 8.788,4.699 10.439,3.048 18.948,3.048 20.32,1.676 23.52,1.676 27.848,6.004 U4.19
S1_DET: R1.1 R9.1 U1.8 | length 5.5
  Top Layer w0.152: R1.1 12.065,20.726
  Top Layer w0.203: R1.1 R9.1 ; 12.065,20.726 12.165,20.726 U1.8
S1_IP: C10.1 C12.2 U4.75 | length 4
  Top Layer w0.254: C10.1 28.753,15.545 29.85,15.545 cw(c29.85,14.331) 30.709,15.189 cw(c30.097,14.578) 30.962,14.578 U4.75
S1_OP: C5.1 C8.2 U4.73 | length 4.7
  Top Layer w0.254: C5.1@30.227,17.474 ccw(c30.04,17.287) C5.1 cw(c30.04,15.754) 31.311,17.025 31.42,16.916 cw(c30.594,16.091) 31.762,16.091 U4.73
S1_PAEN: U1.4 U1.10 U4.63 | length 28.9
  Top Layer w0.152: v1@13.544,17.932 U1.10 ; U1.4 17.431,19.482 17.602,19.482 v1(17.577,19.507) ; U4.63 v1(35.762,16.585)
  Bottom Layer w0.152: v1(13.538,17.932) 14.427,17.932 16.002,19.507 v1(17.577,19.507) 17.932,19.152 33.195,19.152 v1(35.762,16.585)
S1_SW: R19.1 U4.62 | length 3.6
  Top Layer w0.152: U4.62 36.162,16.248 v1(36.5,16.586)
  Bottom Layer w0.152: v1(36.5,16.586) R19.1@36.5,17.534
S1_SWB: U1.13 U4.61 | length 31.6
  Top Layer w0.152: v1(12.647,15.195) 13.189,15.195 U1.13@13.665,15.672 ; U4.61 36.562,14.864 36.477,14.949 36.477,15.938 36.611,16.072 36.798,16.072 v1(37.186,16.459)
  Bottom Layer w0.152: v1(12.647,15.195) 12.647,15.695 15.748,18.796 32.766,18.796 35.509,16.053 36.779,16.053 v1(37.186,16.459)
UD_N: J1.2 U4.43 | length 10.4
  Top Layer w0.203: U4.43 39.363,7.604 39.386,7.582 41.719,7.582 43.459,9.322 43.459,11.752 J1.2
UD_P: J1.3 U4.42 | length 10.2
  Top Layer w0.203: U4.42 39.363,7.204 39.386,7.226 41.866,7.226 43.815,9.175 43.815,11.577 44.288,12.05 44.829,11.508 J1.3
VSYS: C4.1 C35.1 T11.1 U5.10 U5.11 U5.12 U5.13 | length 2.5
  Top Layer w0.762: C35.1@28.054,20.244 T11.1
pads on no net: J1.4 U4.4 U4.5 U4.7 U4.8 U4.13 U4.16 U4.24 U4.25 U4.26 U4.29 U4.30 U4.32 U4.33 U4.34 U4.37 U4.38 U4.39 U4.40 U4.48 U4.49 U4.51 U4.52 U4.64 U4.67 U4.68 U4.70 U4.71 U4.76 U5.4 U6.4 U33.4

## Polygon pours and split planes (outlines as drawn)
3.3VD on Signal Layer 1 "Bottom Layer-No Net" (solid, remove dead copper, pour order 7): 20.955,20.98 20.955,10.795 28.702,10.795 27.559,10.795 27.559,3.937 39.751,3.937 39.751,20.98
5V on Signal Layer 1 "Bottom Layer-No Net" (solid, remove dead copper, pour order 11): 0,0 0,24.994 20.701,24.994 20.701,0
GND on Bottom Layer "Bottom Layer-No Net" (solid, remove dead copper, pour order 12): 0,0 0,24.994 49.512,24.994 49.512,0
1.2D on Bottom Layer "Bottom Layer-No Net" (solid, remove dead copper, pour order 10): 37.084,18.009 41.224,18.009 41.224,3.658 33.02,3.658 32.6,3.658 32.6,6.375 37.084,6.375
1.2A on Bottom Layer "Bottom Layer-No Net" (solid, remove dead copper, pour order 9): 27.737,4.115 31.039,4.115 31.039,12.878 31.039,13.157 35.712,13.157 35.712,17.907 27.737,17.907
GND on Top Layer "Bottom Layer-No Net" (solid, remove dead copper, pour order 8): -0.025,-0.127 0.053,-0.049 49.63,-0.049 49.63,25.071 49.61,25.091 49.588,25.07 -1.397,25.07
GND on GND (split plane): 49.129,0.383 7.144,0.383 0.383,7.144 0.383,19.171 5.823,24.611 49.129,24.611

## Keep-outs
Keep-Out Layer:
  lines w0.127: 0,19.152 0,19.329
  lines w0.254: 0,6.985 6.985,0 49.512,0 49.512,24.994 5.664,24.994 0,19.329 0,6.985

## Other copper
Top Layer:
  rectangle net 5V: 17.221,22.631 18.796,23.571
  rectangle net NetL1_1: 21.996,20.447 22.835,21.717
  rectangle net VSYS: 26.137,20.422 27.534,21.819
  rectangle net VSYS: 25.121,22.454 26.594,24.384
  rectangle net VSYS: 25.959,21.666 26.594,22.479
  rectangle net VSYS: 26.594,21.666 27.534,22.631
Bottom Layer:
  pour cut-out: 35.712,15.85 36.919,15.85 36.919,12.929 35.712,12.929

## Silkscreen, mask and mechanical layers (free items; w line width, h text height)
Bottom Solder:
  region: 9.997,3.139 4.853,8.282 1.979,5.408 7.123,0.265
  region: 5.508,24.464 0.365,19.32 3.239,16.447 8.382,21.59

## Text inside footprints (layer, text, board x,y; h text height)
U1: Top Overlay "*" at 18.284,18.602 h2.54 r225
U2: Top Overlay "*" at 14.345,9.051 h2.54 r225